# Altium PCB CongToDienOnline.PcbDoc
Units mm, origin at the board's own origin, x right, y up, seen from the top; angles counter-clockwise.
Board outline 67.95 x 66.68 mm, 2 copper layers (Top Layer, Bottom Layer); 39 components, 33 nets, 182 pads, 63 vias.
Unrouted connection lines stored in the file: 9.
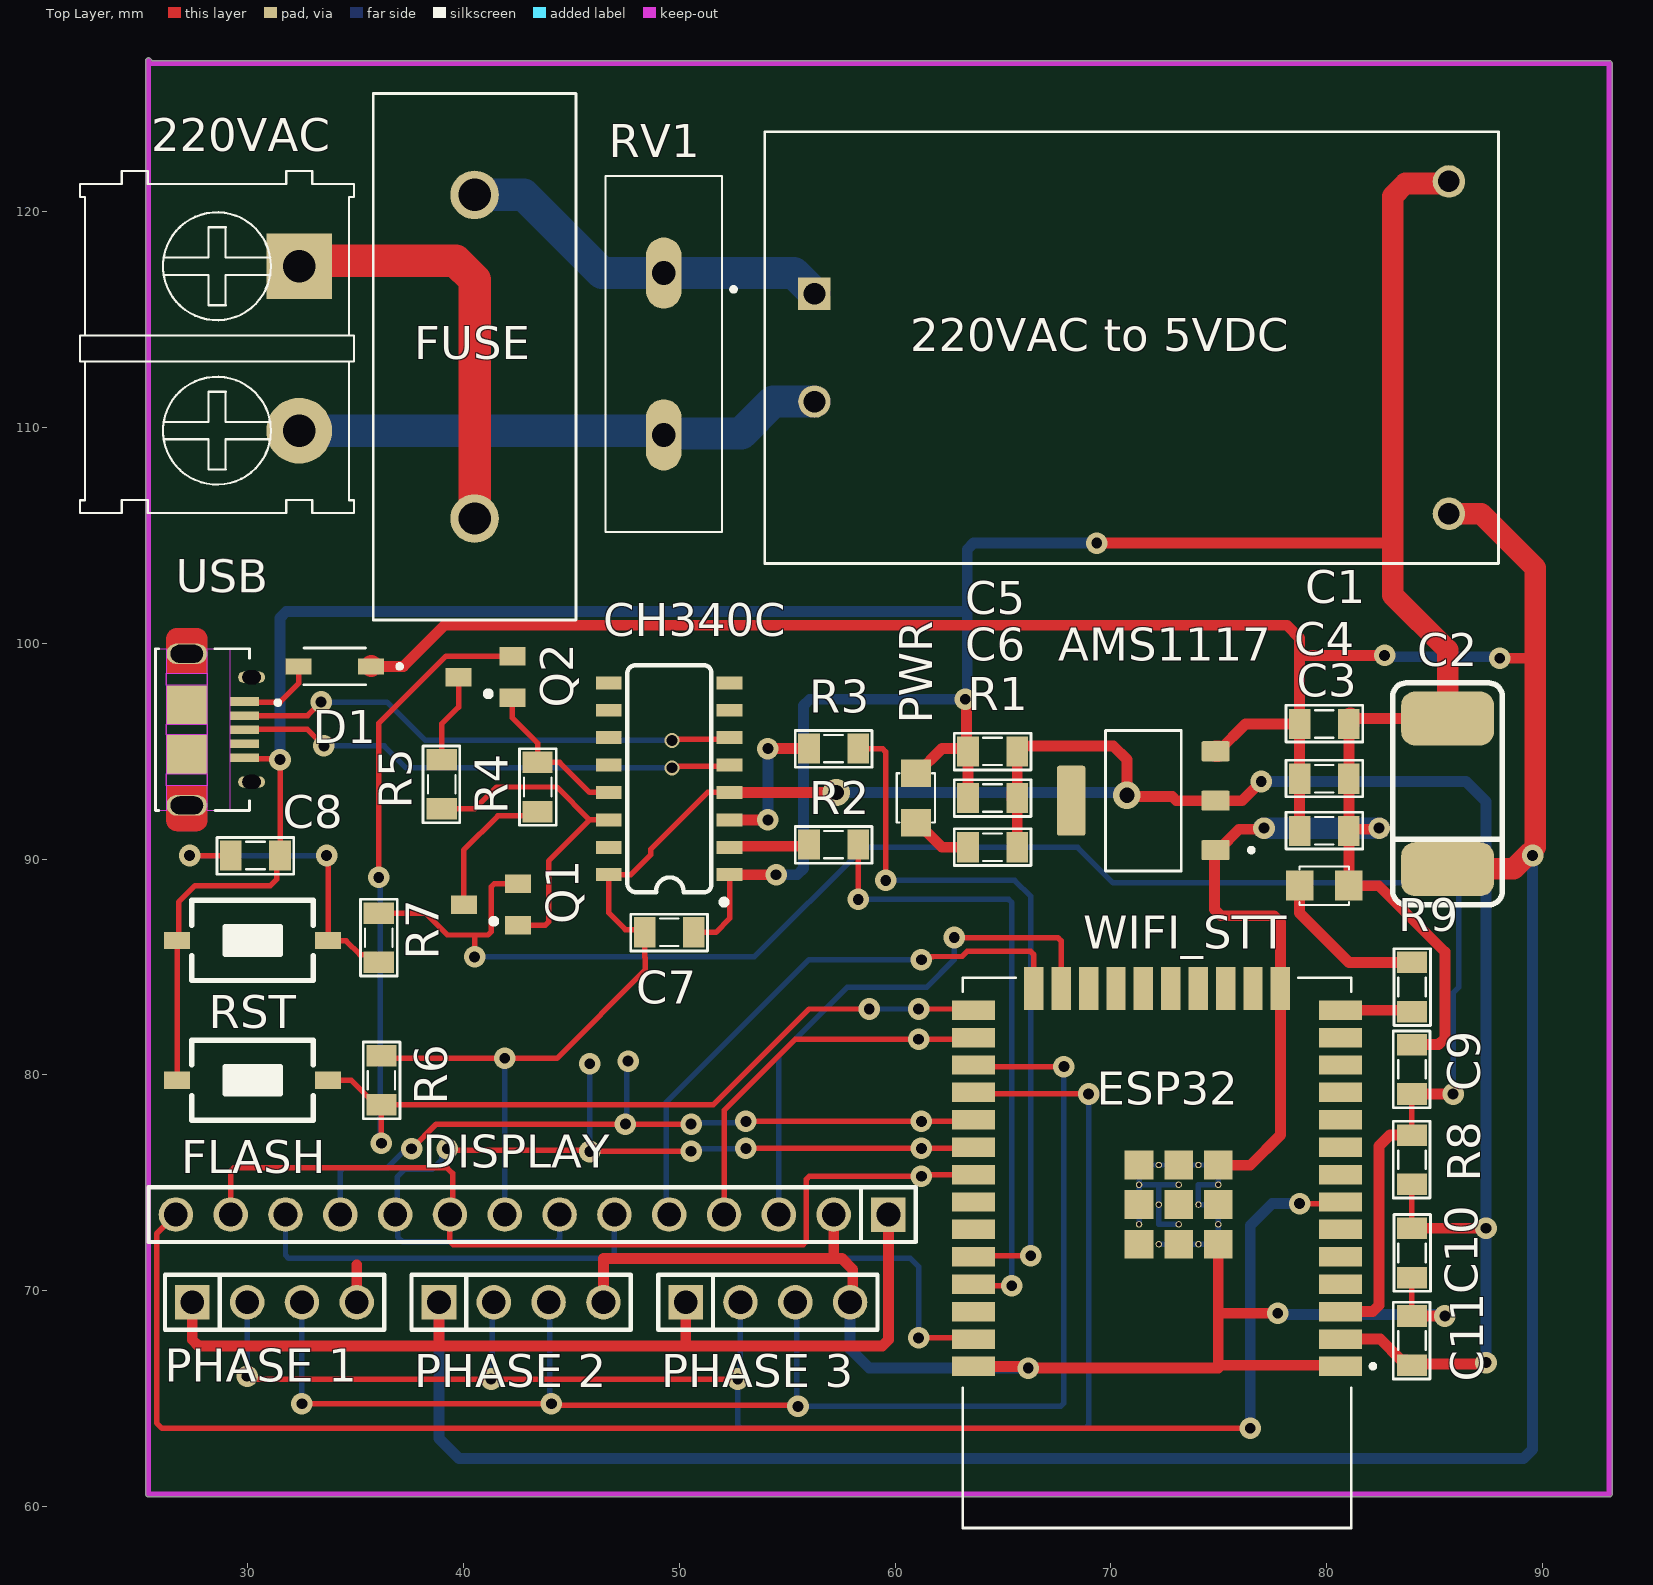
[diagram p0: Top Layer view]
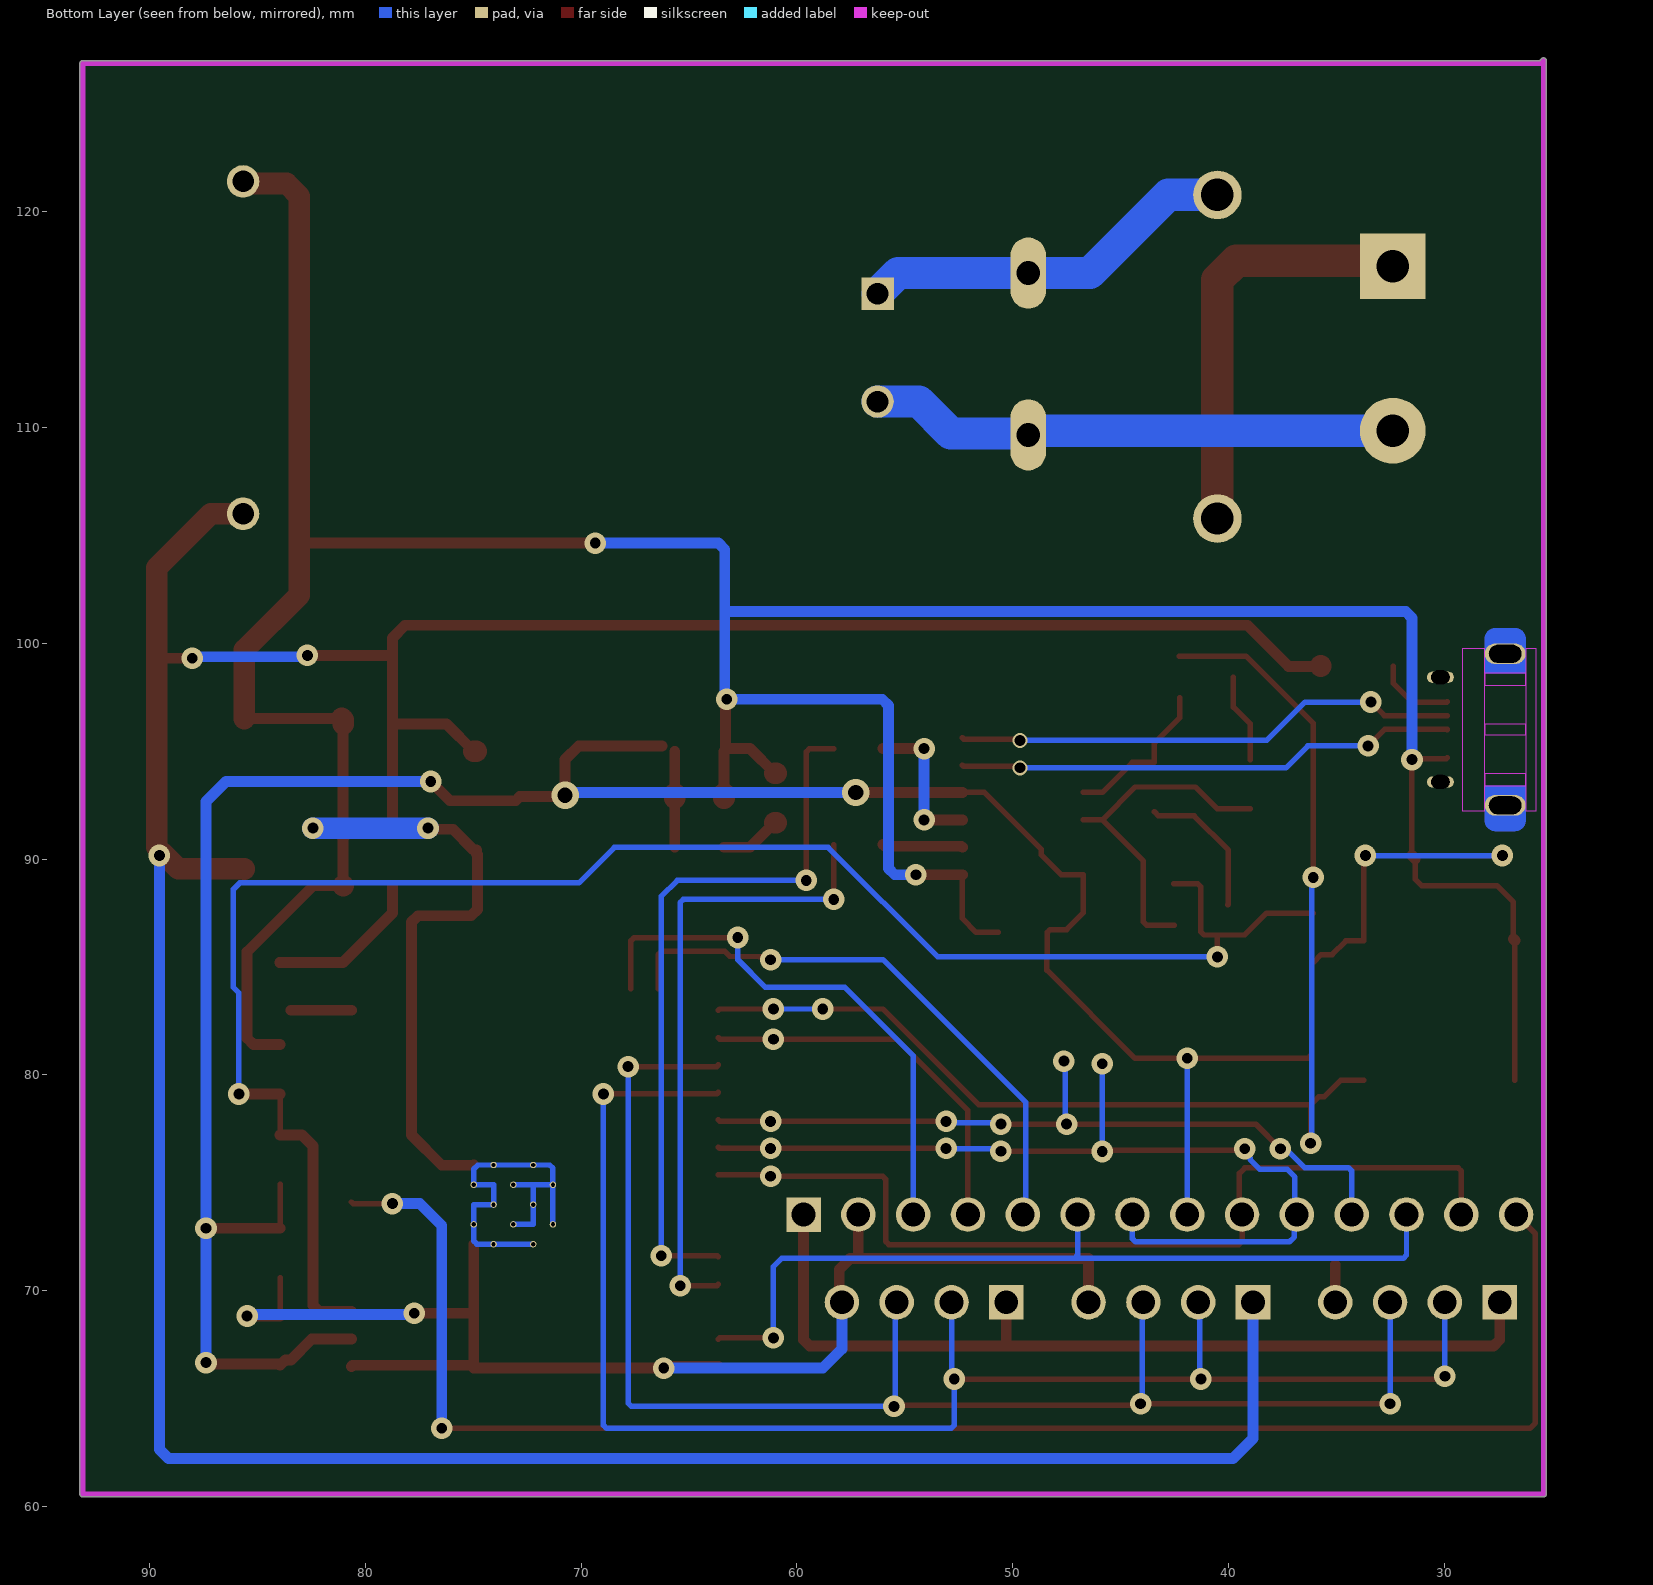
[diagram p1: Bottom Layer view, seen from below]
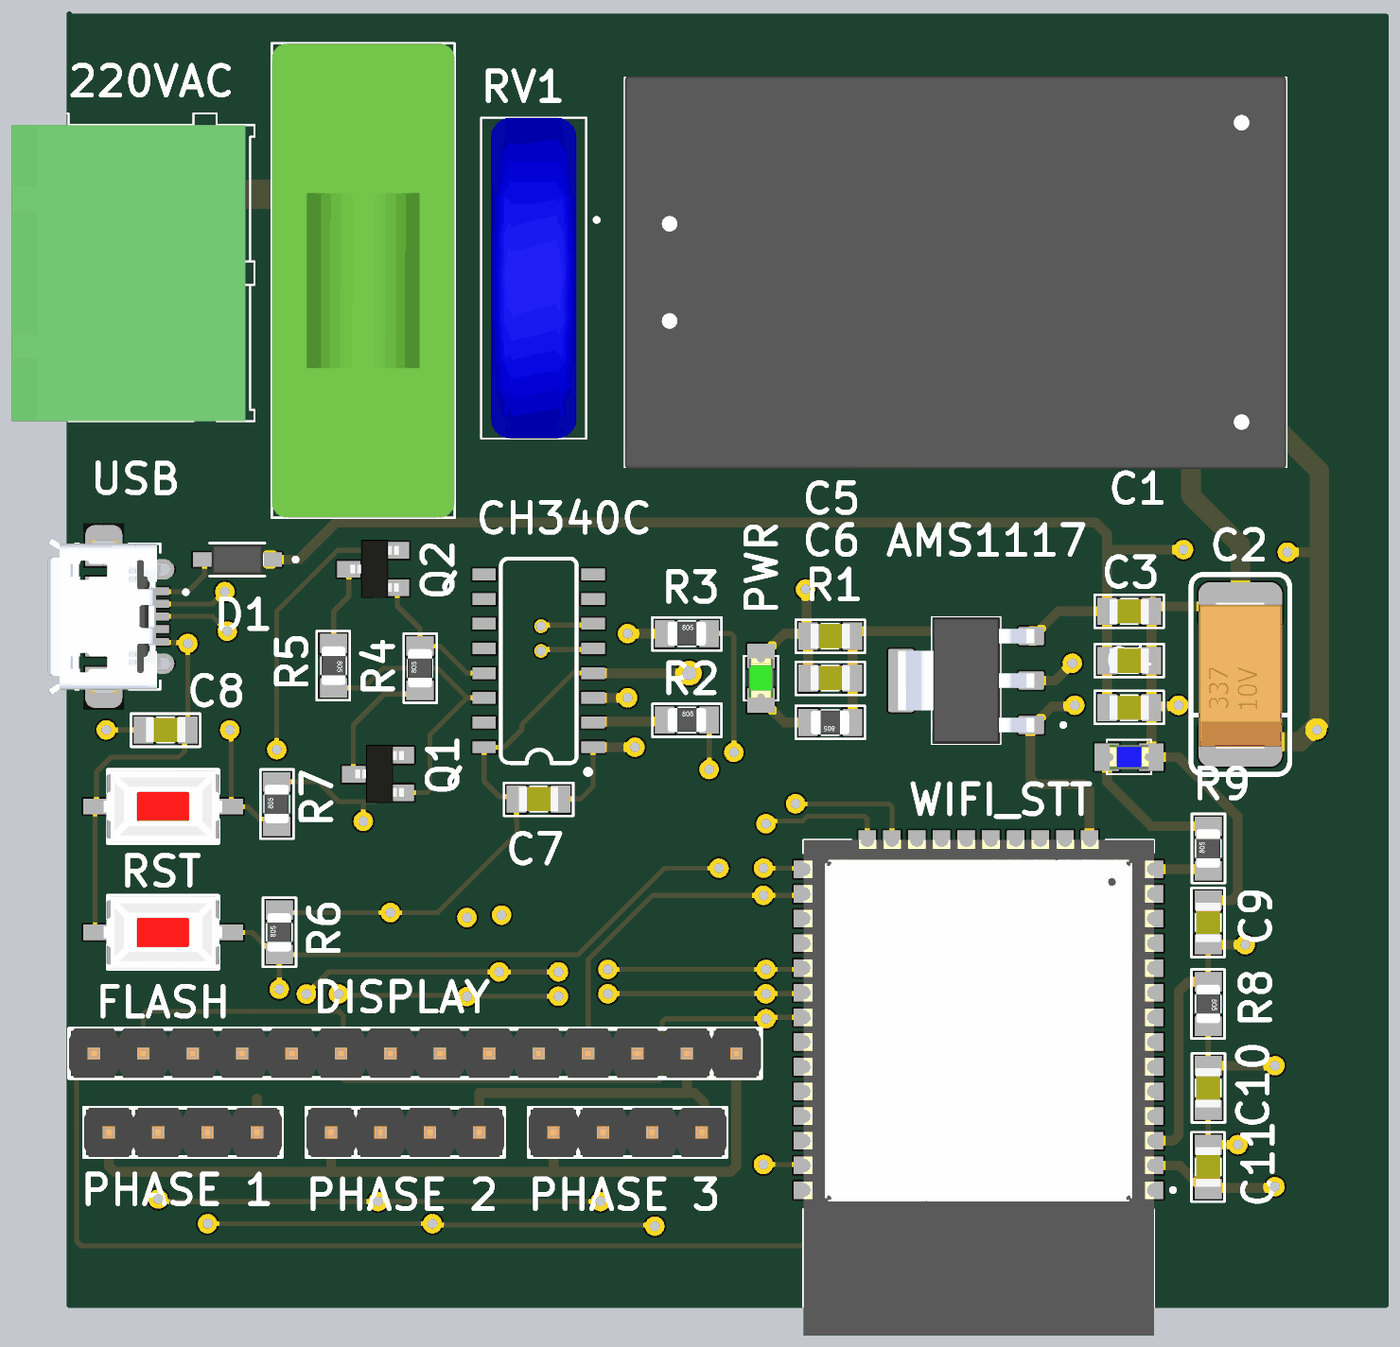
[diagram p2: 3D render of the assembled board from above, using the file's embedded part models]

## Layer stack, top to bottom
Top Solder: solder mask 0.0102, Solder Resist, Dk 3.5
Top Layer: signal copper 0.0356
Dielectric 1: dielectric 0.32, FR-4, Dk 4.8
Bottom Layer: signal copper 0.0356
Bottom Solder: solder mask 0.0102, Solder Resist, Dk 3.5

## Board outline
25.4,60.452 cw(c25.4,60.579) 25.273,60.579 25.273,127 cw(c25.4,127) 25.491,127.09 25.58,127 93.091,127 cw(c93.091,126.873) 93.218,126.873 93.218,60.579 cw(c93.091,60.579) 93.091,60.452

## Design rules (kind name [scope] priority, off if disabled: settings)
Clearance [All] p1: gap=0.254 ignorepadtopadclearanceinfootprint=FALSE except(0: Arc-Hole Track-Hole SMDPad-Hole THPad-Hole Via-Hole Fill-Hole Poly-Hole Region-Hole Text-Hole)
PolygonConnect [All] p1: connectstyle=Relief reliefconductorwidth=0.254 reliefentries=4 polygonreliefangle="90 Angle" airgapwidth=0.254
RoutingVias [All] p1: holewidth=0.7 width=1.27 viastyle="Through Hole" minholewidth=0.2 minwidth=0.7 maxholewidth=0.5 maxwidth=1
SolderMaskExpansion [All] p1: expansion=0.102 istentingtop=FALSE
Width [All] p1: maxlimit=2 minlimit=0.254 preferedwidth=0.5 toplayer_maxwidth=1 minimp=50.000000 maximp=50.000000 favimp=50.000000
30 further rules are at their usual default settings.

## Classes and differential pairs
component class Output: DISPLAY "PHASE 1" "PHASE 2" "PHASE 3"
component class ESP32: C9 C10 C11 ESP32 R8 R9 WIFI_STT
component class USB: C7 C8 CH340C D1 FLASH Q1 Q2 R2 R3 R4 R5 RST USB
component class Power: 220VAC "220VAC to 5VDC" AMS1117 C1 C2 C3 C4 C5 C6 FUSE PWR R1 RV1

## Components (designator, comment, footprint, x,y, rotation, side; value= is the part's Value field where it differs from the comment)
220VAC "KF2" KF2-7.62 28.575,113.665 r270 top (schematic designator J1)
"220VAC to 5VDC" "HLK-PM01" CONV_HLK-PM01 70.961,113.705 r0 top (schematic designator PS1)
AMS1117 "AMS1117-3.3" SOT229P700X180-4N 71.501,92.71 r180 top (schematic designator U1)
C1 "100nF" CAP_0805 79.883,96.266 r180 top value=33p
C2 "CAP_TAN_SMD" CAP_7343 85.598,92.964 r90 top
C3 "10uF/0805" CAP_0805 79.883,91.313 r180 top value=33p
C4 "100nF/0805" CAP_0805 79.883,93.726 r180 top value=33p
C5 "10uF/0805" CAP_0805 64.516,94.996 r0 top value=33p
C6 "100nF/0805" CAP_0805 64.516,92.837 r0 top value=33p
C7 "100nF/0805" CAP_0805 49.53,86.614 r0 top value=33p
C8 "0.1uF/25V/0805" CAP_0805 30.353,90.17 r0 top value=33p
C9 "0.1uF/25v/0805" CAP_0805 83.947,80.264 r270 top value=33p
C10 "0.1uF/25v/0805" CAP_0805 83.947,71.755 r90 top value=33p
C11 "22uF/25V/0805" CAP_0805 83.947,67.691 r270 top value=33p
CH340C "CH340C" SOP-16 49.53,93.726 r90 top (schematic designator U3)
D1 "1N5819" SOD3715X145N 34.036,98.933 r180 top
DISPLAY "JP14" JP14-D1T 59.69,73.533 r180 top (schematic designator C12)
ESP32 "ESP32-WROOM-32" MODULE_ESP32-WROOM-32 72.136,71.755 r180 top (schematic designator IC1)
FLASH "SW" SW-SMD 30.226,79.756 r180 top value="SW chip 2 pin" (schematic designator SW1)
FUSE "F1A" Fuse4 40.513,113.284 r90 top value=Fuse (schematic designator F1)
"PHASE 1" "PHASE 3" JP4-D1T 27.432,69.469 r0 top (schematic designator C15)
"PHASE 2" "PHASE 2" JP4-D1T 38.862,69.469 r0 top (schematic designator C14)
"PHASE 3" "PHASE 1" JP4-D1T 50.292,69.469 r0 top (schematic designator C13)
PWR "LED" LED-0805-Green 60.96,91.694 r90 top value="LED 3 ly Single Colour" (schematic designator LED1)
Q1 "S8050" SOT23 41.275,87.884 r90 top
Q2 "S8050" SOT23 41.021,98.425 r90 top
R1 "1K/0805" RES-SMD-0805 64.516,90.551 r180 top
R2 "1k/0805" RES-SMD-0805 57.15,90.678 r0 top (schematic designator R9)
R3 "1k/0805" RES-SMD-0805 57.15,95.123 r0 top (schematic designator R10)
R4 "10k/0805" RES-SMD-0805 43.434,93.345 r90 top (schematic designator R5)
R5 "10k/0805" RES-SMD-0805 38.989,93.472 r270 top (schematic designator R6)
R6 "10k/0805" RES-SMD-0805 36.195,79.756 r90 top (schematic designator R7)
R7 "0R/0805" RES-SMD-0805 36.068,86.36 r90 top (schematic designator R11)
R8 "10K/0805" RES-SMD-0805 83.947,76.073 r270 top (schematic designator R12)
R9 "330R/0805" RES-SMD-0805 83.947,84.074 r90 top
RST "SW" SW-SMD 30.226,86.233 r180 top value="SW chip 2 pin" (schematic designator SW2)
RV1 "MOV-14D471K" MOV14D471K 49.276,113.411 r90 top
USB "USB" HRS_ZX62D-B-5P8 27.253,96.005 r270 top (schematic designator USB1)
WIFI_STT "WIFI_STATUS_LED" LED-0805-Blue 78.74,88.773 r0 top value="LED 3 ly Single Colour" (schematic designator LED2)

## Footprints (in the part's own frame and the unit in brackets; to place one, negate y for a bottom-side part, rotate by r counter-clockwise, add the part's x,y. Pads: shape width x height; smd on the part's side, far side on the other; paste and mask are expansions set on the pad)
CAP_0805 [mil]
  rect 39.37x55 smd: 1(-45,0) 2(45,0)
  silkscreen extent -70,-34 70,33, body extent -40,-25 40,25, height 24
CAP_7343 [mm] "Capacitor Tantalum 7343"
  rrect50% 2.5x4.3 smd: 1(-3.429,0) 2(3.556,0)
  silkscreen extent -5.08,-2.54 5.21,2.54, body extent -3.75,-2.14 3.75,2.16, height 2.8
CONV_HLK-PM01 [mm]
  rect 1.508x1.508 / inner round 1.508 / far side rect 1.508x1.508 hole 1: 1(-14.7,2.5)
  round 1.508 hole 1: 2(-14.7,-2.5) 3(14.7,7.7) 4(14.7,-7.7)
  silkscreen extent -18.55,-10 17,10, body extent -17,-10.1 17,10.1, height 15
Fuse4 [mm] "FUSEHOLDER BLOCKS - PCB - CLIP COVER - THT - WR-FSH"
  round 2.25 hole 1.5: 1(-7.5,0) 2(7.5,0)
  silkscreen extent -12.2,-4.7 12.2,4.7, body extent -12.2,-4.7 12.2,4.7, height 23.72
HRS_ZX62D-B-5P8 [mm]
  rect 0.4x1.35 smd mask+0.1: 1(-1.3,2.6) 2(-0.65,2.6) 3(0,2.6) 4(0.65,2.6) 5(1.3,2.6)
  oval 0.525x1.25 hole 0.65 slot 0.85 at 90 deg mask+0.1: S1(-2.425,2.925) S2(2.425,2.925)
  oval 0.95x1.9 hole 0.825 slot 1.5 at 90 deg mask+0.1: S3(-3.512,-0.075) S6(3.512,-0.075)
  rect 1.8x1.9 smd mask+0.1: S4(-1.15,-0.075) S5(1.15,-0.075)
  Top Layer region: -2.6,-0.075 -3.1,-0.075 -3.1,0.375 -3.1,0.391 -3.102,0.406 -3.104,0.422 -3.107,0.437 -3.11,0.453 -3.115,0.468 -3.12,0.483 -3.126,0.497 -3.133,0.511 -3.14,0.525 -3.148,0.538 -3.157,0.551 -3.167,0.564 -3.177,0.576 -3.188,0.587 -3.199,0.598 -3.211,0.608 -3.224,0.618 -3.237,0.627 -3.25,0.635 -3.264,0.642 -3.278,0.649 -3.292,0.655 -3.307,0.66 -3.322,0.665 -3.338,0.668 -3.353,0.671 -3.369,0.673 -3.384,0.675 -3.641,0.675 -3.656,0.673 -3.672,0.671 -3.687,0.668 -3.703,0.665 -3.718,0.66 -3.733,0.655 -3.747,0.649 -3.761,0.642 -3.775,0.635 -3.788,0.627 -3.801,0.618 -3.814,0.608 -3.826,0.598 -3.837,0.587 -3.848,0.576 -3.858,0.564 -3.868,0.551 -3.877,0.538 -3.885,0.525 -3.892,0.511 -3.899,0.497 -3.905,0.483 -3.91,0.468 -3.915,0.453 -3.918,0.437 -3.921,0.422 -3.923,0.406 -3.925,0.391 -3.925,0.375 -3.925,-0.075 -4.7,-0.075 -4.7,0.375 -4.699,0.401 -4.697,0.427 -4.694,0.453 -4.689,0.479 -4.683,0.504 -4.676,0.53 -4.667,0.554 -4.657,0.578 -4.646,0.602 -4.633,0.625 -4.619,0.647 -4.605,0.669 -4.589,0.69 -4.572,0.71 -4.554,0.729 -4.535,0.747 -4.515,0.764 -4.494,0.78 -4.472,0.794 -4.45,0.808 -4.427,0.821 -4.403,0.832 -4.379,0.842 -4.355,0.851 -4.329,0.858 -4.304,0.864 -4.278,0.869 -4.252,0.872 -4.226,0.874 -4.2,0.875 -2.6,0.875
  Top Layer region: 4.7,-0.525 4.699,-0.551 4.697,-0.577 4.694,-0.603 4.689,-0.629 4.683,-0.654 4.676,-0.68 4.667,-0.704 4.657,-0.728 4.646,-0.752 4.633,-0.775 4.619,-0.797 4.605,-0.819 4.589,-0.84 4.572,-0.86 4.554,-0.879 4.535,-0.897 4.515,-0.914 4.494,-0.93 4.472,-0.944 4.45,-0.958 4.427,-0.971 4.403,-0.982 4.379,-0.992 4.355,-1.001 4.329,-1.008 4.304,-1.014 4.278,-1.019 4.252,-1.022 4.226,-1.024 4.2,-1.025 2.6,-1.025 2.6,-0.075 3.1,-0.075 3.1,-0.525 3.1,-0.541 3.102,-0.556 3.104,-0.572 3.107,-0.587 3.11,-0.603 3.115,-0.618 3.12,-0.633 3.126,-0.647 3.133,-0.661 3.14,-0.675 3.148,-0.688 3.157,-0.701 3.167,-0.714 3.177,-0.726 3.188,-0.737 3.199,-0.748 3.211,-0.758 3.224,-0.768 3.237,-0.777 3.25,-0.785 3.264,-0.792 3.278,-0.799 3.292,-0.805 3.307,-0.81 3.322,-0.815 3.338,-0.818 3.353,-0.821 3.369,-0.823 3.384,-0.825 3.641,-0.825 3.656,-0.823 3.672,-0.821 3.687,-0.818 3.703,-0.815 3.718,-0.81 3.733,-0.805 3.747,-0.799 3.761,-0.792 3.775,-0.785 3.788,-0.777 3.801,-0.768 3.814,-0.758 3.826,-0.748 3.837,-0.737 3.848,-0.726 3.858,-0.714 3.868,-0.701 3.877,-0.688 3.885,-0.675 3.892,-0.661 3.899,-0.647 3.905,-0.633 3.91,-0.618 3.915,-0.603 3.918,-0.587 3.921,-0.572 3.923,-0.556 3.925,-0.541 3.925,-0.525 3.925,-0.075 4.7,-0.075
  Top Layer region: -2.6,-1.025 -4.2,-1.025 -4.226,-1.024 -4.252,-1.022 -4.278,-1.019 -4.304,-1.014 -4.329,-1.008 -4.355,-1.001 -4.379,-0.992 -4.403,-0.982 -4.427,-0.971 -4.45,-0.958 -4.472,-0.944 -4.494,-0.93 -4.515,-0.914 -4.535,-0.897 -4.554,-0.879 -4.572,-0.86 -4.589,-0.84 -4.605,-0.819 -4.619,-0.797 -4.633,-0.775 -4.646,-0.752 -4.657,-0.728 -4.667,-0.704 -4.676,-0.68 -4.683,-0.654 -4.689,-0.629 -4.694,-0.603 -4.697,-0.577 -4.699,-0.551 -4.7,-0.525 -4.7,-0.075 -3.925,-0.075 -3.925,-0.55 -3.925,-0.564 -3.923,-0.579 -3.922,-0.593 -3.919,-0.607 -3.916,-0.621 -3.912,-0.635 -3.907,-0.649 -3.901,-0.662 -3.895,-0.675 -3.888,-0.688 -3.881,-0.7 -3.872,-0.712 -3.864,-0.723 -3.854,-0.734 -3.844,-0.744 -3.834,-0.754 -3.823,-0.764 -3.812,-0.772 -3.8,-0.781 -3.787,-0.788 -3.775,-0.795 -3.762,-0.801 -3.749,-0.807 -3.735,-0.812 -3.721,-0.816 -3.707,-0.819 -3.693,-0.822 -3.679,-0.823 -3.664,-0.825 -3.384,-0.825 -3.369,-0.823 -3.353,-0.821 -3.338,-0.818 -3.322,-0.815 -3.307,-0.81 -3.292,-0.805 -3.278,-0.799 -3.264,-0.792 -3.25,-0.785 -3.237,-0.777 -3.224,-0.768 -3.211,-0.758 -3.199,-0.748 -3.188,-0.737 -3.177,-0.726 -3.167,-0.714 -3.157,-0.701 -3.148,-0.688 -3.14,-0.675 -3.133,-0.661 -3.126,-0.647 -3.12,-0.633 -3.115,-0.618 -3.11,-0.603 -3.107,-0.587 -3.104,-0.572 -3.102,-0.556 -3.1,-0.541 -3.1,-0.525 -3.1,-0.075 -2.6,-0.075
  Top Layer region: 4.226,0.874 4.252,0.872 4.278,0.869 4.304,0.864 4.329,0.858 4.355,0.851 4.379,0.842 4.403,0.832 4.427,0.821 4.45,0.808 4.472,0.794 4.494,0.78 4.515,0.764 4.535,0.747 4.554,0.729 4.572,0.71 4.589,0.69 4.605,0.669 4.619,0.647 4.633,0.625 4.646,0.602 4.657,0.578 4.667,0.554 4.676,0.53 4.683,0.504 4.689,0.479 4.694,0.453 4.697,0.427 4.699,0.401 4.7,0.375 4.7,-0.075 3.925,-0.075 3.925,0.4 3.925,0.414 3.923,0.429 3.922,0.443 3.919,0.457 3.916,0.471 3.912,0.485 3.907,0.499 3.901,0.512 3.895,0.525 3.888,0.538 3.881,0.55 3.872,0.562 3.864,0.573 3.854,0.584 3.844,0.594 3.834,0.604 3.823,0.614 3.812,0.622 3.8,0.631 3.787,0.638 3.775,0.645 3.762,0.651 3.749,0.657 3.735,0.662 3.721,0.666 3.707,0.669 3.693,0.672 3.679,0.673 3.664,0.675 3.384,0.675 3.369,0.673 3.353,0.671 3.338,0.668 3.322,0.665 3.307,0.66 3.292,0.655 3.278,0.649 3.264,0.642 3.25,0.635 3.237,0.627 3.224,0.618 3.211,0.608 3.199,0.598 3.188,0.587 3.177,0.576 3.167,0.564 3.157,0.551 3.148,0.538 3.14,0.525 3.133,0.511 3.126,0.497 3.12,0.483 3.115,0.468 3.11,0.453 3.107,0.437 3.104,0.422 3.102,0.406 3.1,0.391 3.1,0.375 3.1,-0.075 2.6,-0.075 2.6,0.875 4.2,0.875
  Bottom Layer region: -2.6,-0.075 -3.1,-0.075 -3.1,0.375 -3.1,0.391 -3.102,0.406 -3.104,0.422 -3.107,0.437 -3.11,0.453 -3.115,0.468 -3.12,0.483 -3.126,0.497 -3.133,0.511 -3.14,0.525 -3.148,0.538 -3.157,0.551 -3.167,0.564 -3.177,0.576 -3.188,0.587 -3.199,0.598 -3.211,0.608 -3.224,0.618 -3.237,0.627 -3.25,0.635 -3.264,0.642 -3.278,0.649 -3.292,0.655 -3.307,0.66 -3.322,0.665 -3.338,0.668 -3.353,0.671 -3.369,0.673 -3.384,0.675 -3.641,0.675 -3.656,0.673 -3.672,0.671 -3.687,0.668 -3.703,0.665 -3.718,0.66 -3.733,0.655 -3.747,0.649 -3.761,0.642 -3.775,0.635 -3.788,0.627 -3.801,0.618 -3.814,0.608 -3.826,0.598 -3.837,0.587 -3.848,0.576 -3.858,0.564 -3.868,0.551 -3.877,0.538 -3.885,0.525 -3.892,0.511 -3.899,0.497 -3.905,0.483 -3.91,0.468 -3.915,0.453 -3.918,0.437 -3.921,0.422 -3.923,0.406 -3.925,0.391 -3.925,0.375 -3.925,-0.075 -4.7,-0.075 -4.7,0.375 -4.699,0.401 -4.697,0.427 -4.694,0.453 -4.689,0.479 -4.683,0.504 -4.676,0.53 -4.667,0.554 -4.657,0.578 -4.646,0.602 -4.633,0.625 -4.619,0.647 -4.605,0.669 -4.589,0.69 -4.572,0.71 -4.554,0.729 -4.535,0.747 -4.515,0.764 -4.494,0.78 -4.472,0.794 -4.45,0.808 -4.427,0.821 -4.403,0.832 -4.379,0.842 -4.355,0.851 -4.329,0.858 -4.304,0.864 -4.278,0.869 -4.252,0.872 -4.226,0.874 -4.2,0.875 -2.6,0.875
  Bottom Layer region: 4.7,-0.525 4.699,-0.551 4.697,-0.577 4.694,-0.603 4.689,-0.629 4.683,-0.654 4.676,-0.68 4.667,-0.704 4.657,-0.728 4.646,-0.752 4.633,-0.775 4.619,-0.797 4.605,-0.819 4.589,-0.84 4.572,-0.86 4.554,-0.879 4.535,-0.897 4.515,-0.914 4.494,-0.93 4.472,-0.944 4.45,-0.958 4.427,-0.971 4.403,-0.982 4.379,-0.992 4.355,-1.001 4.329,-1.008 4.304,-1.014 4.278,-1.019 4.252,-1.022 4.226,-1.024 4.2,-1.025 2.6,-1.025 2.6,-0.075 3.1,-0.075 3.1,-0.525 3.1,-0.541 3.102,-0.556 3.104,-0.572 3.107,-0.587 3.11,-0.603 3.115,-0.618 3.12,-0.633 3.126,-0.647 3.133,-0.661 3.14,-0.675 3.148,-0.688 3.157,-0.701 3.167,-0.714 3.177,-0.726 3.188,-0.737 3.199,-0.748 3.211,-0.758 3.224,-0.768 3.237,-0.777 3.25,-0.785 3.264,-0.792 3.278,-0.799 3.292,-0.805 3.307,-0.81 3.322,-0.815 3.338,-0.818 3.353,-0.821 3.369,-0.823 3.384,-0.825 3.641,-0.825 3.656,-0.823 3.672,-0.821 3.687,-0.818 3.703,-0.815 3.718,-0.81 3.733,-0.805 3.747,-0.799 3.761,-0.792 3.775,-0.785 3.788,-0.777 3.801,-0.768 3.814,-0.758 3.826,-0.748 3.837,-0.737 3.848,-0.726 3.858,-0.714 3.868,-0.701 3.877,-0.688 3.885,-0.675 3.892,-0.661 3.899,-0.647 3.905,-0.633 3.91,-0.618 3.915,-0.603 3.918,-0.587 3.921,-0.572 3.923,-0.556 3.925,-0.541 3.925,-0.525 3.925,-0.075 4.7,-0.075
  Bottom Layer region: -2.6,-1.025 -4.2,-1.025 -4.226,-1.024 -4.252,-1.022 -4.278,-1.019 -4.304,-1.014 -4.329,-1.008 -4.355,-1.001 -4.379,-0.992 -4.403,-0.982 -4.427,-0.971 -4.45,-0.958 -4.472,-0.944 -4.494,-0.93 -4.515,-0.914 -4.535,-0.897 -4.554,-0.879 -4.572,-0.86 -4.589,-0.84 -4.605,-0.819 -4.619,-0.797 -4.633,-0.775 -4.646,-0.752 -4.657,-0.728 -4.667,-0.704 -4.676,-0.68 -4.683,-0.654 -4.689,-0.629 -4.694,-0.603 -4.697,-0.577 -4.699,-0.551 -4.7,-0.525 -4.7,-0.075 -3.925,-0.075 -3.925,-0.55 -3.925,-0.564 -3.923,-0.579 -3.922,-0.593 -3.919,-0.607 -3.916,-0.621 -3.912,-0.635 -3.907,-0.649 -3.901,-0.662 -3.895,-0.675 -3.888,-0.688 -3.881,-0.7 -3.872,-0.712 -3.864,-0.723 -3.854,-0.734 -3.844,-0.744 -3.834,-0.754 -3.823,-0.764 -3.812,-0.772 -3.8,-0.781 -3.787,-0.788 -3.775,-0.795 -3.762,-0.801 -3.749,-0.807 -3.735,-0.812 -3.721,-0.816 -3.707,-0.819 -3.693,-0.822 -3.679,-0.823 -3.664,-0.825 -3.384,-0.825 -3.369,-0.823 -3.353,-0.821 -3.338,-0.818 -3.322,-0.815 -3.307,-0.81 -3.292,-0.805 -3.278,-0.799 -3.264,-0.792 -3.25,-0.785 -3.237,-0.777 -3.224,-0.768 -3.211,-0.758 -3.199,-0.748 -3.188,-0.737 -3.177,-0.726 -3.167,-0.714 -3.157,-0.701 -3.148,-0.688 -3.14,-0.675 -3.133,-0.661 -3.126,-0.647 -3.12,-0.633 -3.115,-0.618 -3.11,-0.603 -3.107,-0.587 -3.104,-0.572 -3.102,-0.556 -3.1,-0.541 -3.1,-0.525 -3.1,-0.075 -2.6,-0.075
  Bottom Layer region: 4.226,0.874 4.252,0.872 4.278,0.869 4.304,0.864 4.329,0.858 4.355,0.851 4.379,0.842 4.403,0.832 4.427,0.821 4.45,0.808 4.472,0.794 4.494,0.78 4.515,0.764 4.535,0.747 4.554,0.729 4.572,0.71 4.589,0.69 4.605,0.669 4.619,0.647 4.633,0.625 4.646,0.602 4.657,0.578 4.667,0.554 4.676,0.53 4.683,0.504 4.689,0.479 4.694,0.453 4.697,0.427 4.699,0.401 4.7,0.375 4.7,-0.075 3.925,-0.075 3.925,0.4 3.925,0.414 3.923,0.429 3.922,0.443 3.919,0.457 3.916,0.471 3.912,0.485 3.907,0.499 3.901,0.512 3.895,0.525 3.888,0.538 3.881,0.55 3.872,0.562 3.864,0.573 3.854,0.584 3.844,0.594 3.834,0.604 3.823,0.614 3.812,0.622 3.8,0.631 3.787,0.638 3.775,0.645 3.762,0.651 3.749,0.657 3.735,0.662 3.721,0.666 3.707,0.669 3.693,0.672 3.679,0.673 3.664,0.675 3.384,0.675 3.369,0.673 3.353,0.671 3.338,0.668 3.322,0.665 3.307,0.66 3.292,0.655 3.278,0.649 3.264,0.642 3.25,0.635 3.237,0.627 3.224,0.618 3.211,0.608 3.199,0.598 3.188,0.587 3.177,0.576 3.167,0.564 3.157,0.551 3.148,0.538 3.14,0.525 3.133,0.511 3.126,0.497 3.12,0.483 3.115,0.468 3.11,0.453 3.107,0.437 3.104,0.422 3.102,0.406 3.1,0.391 3.1,0.375 3.1,-0.075 2.6,-0.075 2.6,0.875 4.2,0.875
  Keep-Out Layer region: -2.05,-1.025 -2.6,-1.025 -2.6,0.875 -2.05,0.875
  Keep-Out Layer region: 0.25,-1.025 -0.25,-1.025 -0.25,0.875 0.25,0.875
  Keep-Out Layer region: 2.6,-1.025 2.05,-1.025 2.05,0.875 2.6,0.875
  Keep-Out Layer region: 3.75,0.875 -3.75,0.875 -3.75,1.925 3.75,1.925
  Keep-Out Layer region: -2.05,-1.025 -2.6,-1.025 -2.6,0.875 -2.05,0.875
  Keep-Out Layer region: 0.25,-1.025 -0.25,-1.025 -0.25,0.875 0.25,0.875
  Keep-Out Layer region: 2.6,-1.025 2.05,-1.025 2.05,0.875 2.6,0.875
  Keep-Out Layer region: 3.75,-1.525 -3.75,-1.525 -3.75,-1.025 3.75,-1.025
  silkscreen extent -3.75,-1.53 3.75,4.24, body extent -4.05,-2.95 4.05,2.85, height 1.48
JP4-D1T [mm] "4 pins, 1 row, straight, gold plating"
  rect 1.6x1.6 hole 1.1: 1(0,0)
  round 1.6 hole 1.1: 2(2.54,0) 3(5.08,0) 4(7.62,0)
  silkscreen extent -1.27,-1.27 8.89,1.27, body extent -1.27,-1.27 8.89,1.27, height 8.54
JP14-D1T [mm] "14 pins, 1 row, straight, gold plating"
  rect 1.6x1.6 hole 1.1: 1(0,0)
  round 1.6 hole 1.1: 2(2.54,0) 3(5.08,0) 4(7.62,0) 5(10.16,0) 6(12.7,0) 7(15.24,0) 8(17.78,0) 9(20.32,0) 10(22.86,0) 11(25.4,0) 12(27.94,0) 13(30.48,0) 14(33.02,0)
  silkscreen extent -1.27,-1.27 34.29,1.27, body extent -1.27,-1.27 34.29,1.27, height 8.54
KF2-7.62 [mil]
  rect 120x120 hole 59.06 unplated: 1(-150,150)
  round 120 hole 59.06 unplated: 2(150,150)
  silkscreen extent -324,-250 300,250, body extent -300,-241 300,231, height 337
LED-0805-Blue [mil]
  rect 50x55 smd: 1(0,0) 2(90,0)
  silkscreen extent 0,-35 90,35, body extent 5,-25 85,25, height 43
LED-0805-Green [mil]
  rect 50x55 smd: 1(0,0) 2(90,0)
  silkscreen extent 0,-35 90,35, body extent 5,-25 85,25, height 43
MODULE_ESP32-WROOM-32 [mm]
  rect 2x0.9 smd: 1(-8.5,5.26) 2(-8.5,3.99) 3(-8.5,2.72) 4(-8.5,1.45) 5(-8.5,0.18) 6(-8.5,-1.09) 7(-8.5,-2.36) 8(-8.5,-3.63) 9(-8.5,-4.9) 10(-8.5,-6.17) 11(-8.5,-7.44) 12(-8.5,-8.71) 13(-8.5,-9.98) 14(-8.5,-11.25) 25(8.5,-11.25) 26(8.5,-9.98) 27(8.5,-8.71) 28(8.5,-7.44) 29(8.5,-6.17) 30(8.5,-4.9) 31(8.5,-3.63) 32(8.5,-2.36) 33(8.5,-1.09) 34(8.5,0.18) 35(8.5,1.45) 36(8.5,2.72) 37(8.5,3.99) 38(8.5,5.26)
  rect 0.9x2 smd: 15(-5.715,-12.25) 16(-4.445,-12.25) 17(-3.175,-12.25) 18(-1.905,-12.25) 19(-0.635,-12.25) 20(0.635,-12.25) 21(1.905,-12.25) 22(3.175,-12.25) 23(4.445,-12.25) 24(5.715,-12.25)
  rect 1.33x1.33 smd: 39_1(-2.835,-0.405) 39_2(-1,-0.405) 39_3(0.835,-0.405) 39_4(-2.835,-2.24) 39_5(-1,-2.24) 39_6(0.835,-2.24) 39_7(-2.835,-4.075) 39_8(-1,-4.075) 39_9(0.835,-4.075)
  round 0.3 hole 0.2: 39_10(-1.917,-0.405) 39_11(-0.082,-0.405) 39_12(-2.835,-1.322) 39_13(-1,-1.322) 39_14(0.835,-1.322) 39_15(-1.917,-2.24) 39_16(-0.082,-2.24) 39_17(-2.835,-3.157) 39_18(-1,-3.157) 39_19(0.835,-3.157) 39_20(-1.917,-4.075) 39_21(-0.082,-4.075)
  silkscreen extent -10.1,-12.75 9,12.75, body extent -9.02,-12.75 8.98,12.75, height 3.2
MOV14D471K [mm]
  oval 3.3x1.65 hole 1.1: 1(-3.75,0) 2(3.75,0)
  silkscreen extent -8.25,-2.7 8.25,2.7, body extent -8.25,-2.2 8.25,2.2, height 20
RES-SMD-0805 [mil]
  rect 39.37x55 smd: 1(-45,0) 2(45,0)
  silkscreen extent -70,-34 70,33, body extent -39,-25 39,25, height 31
SOD3715X145N [mm]
  rect 1.21x0.73 smd: A(1.68,0) C(-1.68,0)
  silkscreen extent -3.1,-0.85 1.43,0.85, body extent -1.83,-0.77 1.83,0.77, height 0.8
SOP-16 [mm]
  rect 0.6x1.2 smd: 1(-4.445,-2.8) 2(-3.175,-2.8) 3(-1.905,-2.8) 4(-0.635,-2.8) 5(0.635,-2.8) 6(1.905,-2.8) 7(3.175,-2.8) 8(4.445,-2.8) 9(4.445,2.8) 10(3.175,2.8) 11(1.905,2.8) 12(0.635,2.8) 13(-0.635,2.8) 14(-1.905,2.8) 15(-3.175,2.8) 16(-4.445,2.8)
  silkscreen extent -5.84,-2.67 5.26,1.95, body extent -4.95,-3.47 4.95,3.47, height 1.75
SOT23 [mm] "SOT 23 _ 1-3-2"
  rect 0.85x1.2 smd: 1(-0.94,-1.245) 2(0.985,-1.25) 3(0.005,1.25)
  silkscreen extent -0.88,-0.25 -0.64,0, body extent -1.47,-1.33 1.53,1.17, height 1.06
SOT229P700X180-4N [mm]
  rrect15% 1.31x0.93 smd: 1(-3.345,2.29) 2(-3.345,0) 3(-3.345,-2.29)
  rrect15% 1.31x3.24 smd: 4(3.345,0)
  silkscreen extent -5.1,-3.25 1.75,3.25, body extent -3.5,-3.25 3.5,3.25, height 1.8
SW-SMD [mm] "Switch SMD type"
  rect 1.2x0.8 smd: 1(-3.5,0) 2(3.5,0)
  silkscreen extent -2.82,-1.85 2.82,1.85, body extent -3.05,-1.85 3.05,1.85, height 2.5

## Part data
220VAC: Manufacturer="Würth Elektronik eiSos GmbH", partNo=691103110002, ComponentLink1 Description=Manufacturer, ComponentLink1URL=http://www.we-online.com, ComponentLink2 Description=Datasheet, ComponentLink2URL=http://katalog.we-online.de/em/datasheet/6911031100xx.pdf, Created by="Karrer Zheng", Created Date="29 October 2013", NoPins=2
"220VAC to 5VDC": "The HLK-PM01 is a small size low cost AC to DC converter which can take in 110V/220V AC at 50/60 Hz and give 5V 3W output. The module is can be used in designs which run on 5V and needs to be powered form the AC mains.", Package=None, Availability="Not in stock", Check_prices=https://www.snapeda.com/parts/hlk-pm01/Hi-link/view-part/?ref=eda, MF=Hi-link, MP=hlk-pm01, Price=None, SnapEDA_Link=https://www.snapeda.com/parts/hlk-pm01/Hi-link/view-part/?ref=snap
AMS1117: "Sot223/Pkg 1-Amp 3.3-Volt Low Drop Out Voltage Regulatator", Package="SOT-223 Seeed Technology", Availability="Not in stock", Check_prices=https://www.snapeda.com/parts/AMS1117-3.3/Advanced+Monolithic+Systems/view-part/?ref=eda, MF="Advanced Monolithic Systems", MP=AMS1117-3.3, Price=None, SnapEDA_Link=https://www.snapeda.com/parts/AMS1117-3.3/Advanced+Monolithic+Systems/view-part/?ref=snap
C1 C3 C4 C5 C6 C7 C8 C9 C10 C11: library part CapSMD, "Capacitor", LatestRevisionDate=17-Jul-2002, LatestRevisionNote="Re-released for DXP Platform.", PackageReference=RAD-0.3, Published=8-Jun-2000, Publisher="Altium Limited"
C2: "Polazied Tantalum Capacitor"
CH340C: "USB to serial chip CH340", Package=Package, Availability=Unavailable, Check_prices=https://www.snapeda.com/parts/CH340C/WCH/view-part/5428851/?ref=eda, MF=WCH, MP=CH340C, Price=None, SnapEDA_Link=https://www.snapeda.com/parts/CH340C/WCH/view-part/5428851/?ref=snap
D1: library part 1N5819HW-7-F, "Diode Schottky 40 V 1A Surface Mount SOD-123", Package="SOD-123 Fairchild Semiconductor", Availability="In Stock", Check_prices=https://www.snapeda.com/parts/1N5819HW-7-F/Diodes+Inc./view-part/?ref=eda, MF="Diodes Inc.", MP=1N5819HW-7-F, Price=None, Purchase-URL=https://pricing.snapeda.com/search/part/1N5819HW-7-F/?ref=eda, SnapEDA_Link=https://www.snapeda.com/parts/1N5819HW-7-F/Diodes+Inc./view-part/?ref=snap
DISPLAY: "WR-PHD 2.54 mm Angled Socket Header", Manufacturer="W¨¹rth Elektronik eiSos GmbH", partNo=613014143121, ComponentLink1 Description=Manufacturer, ComponentLink1URL=http://www.we-online.com, ComponentLink2 Description=Datasheet, ComponentLink2URL=http://katalog.we-online.de/em/datasheet/6130xx143121.pdf, Created by="Karrer Zheng", Created Date="29 March 2013", NoPins=14
ESP32: "Bluetooth, WiFi Transceiver Module 2.4GHz ~ 2.5GHz Surface Mount", Package="Module Espressif Systems", Digi-Key_Part_Number=1904-1010-1-ND, Digi-Key_Purchase_URL=https://www.digikey.com/product-detail/en/espressif-systems/ESP32-WROOM-32/1904-1010-1-ND/8544305?utm_source=snapeda&utm_medium=aggregator&utm_campaign=symbol, MF="Espressif Systems", MP=ESP32-WROOM-32, SnapEDA_Link=https://www.snapeda.com/parts/ESP32-WROOM-32/Espressif%20Systems/view-part/2753322/?ref=snap
FLASH RST: library part SW2, "Switch button 2 pin"
FUSE: library part Fuse, "Fuse", Designed by=VanDungEvn
"PHASE 1" "PHASE 2" "PHASE 3": library part JP4, "WR-PHD 2.54 mm Angled Socket Header", Manufacturer="W¨¹rth Elektronik eiSos GmbH", partNo=613004143121, ComponentLink1 Description=Manufacturer, ComponentLink1URL=http://www.we-online.com, ComponentLink2 Description=Datasheet, ComponentLink2URL=http://katalog.we-online.de/em/datasheet/6130xx143121.pdf, Created by="Karrer Zheng", Created Date="29 March 2013", NoPins=04
PWR: "LED Single colour Green and Red"
Q1 Q2: library part NPN, "NPN General", PackageDocument=Sep-1998, Code_JEDEC=TO-92A, ComponentLink1Description="Manufacturer Link", ComponentLink1URL=http://www.fairchildsemi.com/, ComponentLink2Description=Datasheet, ComponentLink2URL=http://www.fairchildsemi.com/ds/2N%2F2N3904.pdf, DatasheetDocument=1997, LatestRevisionDate=15-Jan-2003, LatestRevisionNote="PCB Footprint 'BCY-W3/D4.7' replaced", PackageReference=TO-92A, Published=8-Jun-2000, Publisher="Altium Limited"
R1 R2 R3 R4 R5 R6 R7 R8 R9: library part "Resistor - SMD", "Resistor SMD", Manufacturer="Generic Components", Class=Passive, Published=08/06/2000, Publisher="Altium Hobart Technology Centre"
RV1: "470 V 4.5 kA Varistor 1 Circuit Through Hole Disc 14mm", Package="Disc-14 Bourns", Availability="In Stock", Check_prices=https://www.snapeda.com/parts/MOV-14D471K/Bourns/view-part/?ref=eda, MF=Bourns, MP=MOV-14D471K, Price=None, Purchase-URL=https://pricing.snapeda.com/search/part/MOV-14D471K/?ref=eda, SnapEDA_Link=https://www.snapeda.com/parts/MOV-14D471K/Bourns/view-part/?ref=snap
USB: library part USB-M
WIFI_STT: library part LED, "LED Single colour Green and Red"

## Via types
v1: diameter 1, hole 0.5, Top Layer to Bottom Layer, 59 vias
v2: diameter 1.27, hole 0.711, Top Layer to Bottom Layer, 2 vias
v3: diameter 0.7, hole 0.5, Top Layer to Bottom Layer, 2 vias

## Nets (pads, with @x,y where several pads share a name; then routed paths per layer and width w, separated by ;. In a path a pad name is that pad's centre, name@x,y a point inside that pad or via, vN(x,y) a via of type N, cw(c..) or ccw(c..) an arc to the next point about the centre after c; other vN are vias at no path point)
3V3: AMS1117.2 C5.2 C6.2 C7.1 C10.2 C11.2 CH340C.4 CH340C.16 DISPLAY.8 ESP32.2 R1.1 R6.2 R8.2 | length 119.6
  Top Layer w0.254: R6.2 36.322,80.772 44.323,80.772 48.409,84.858 48.409,85.439 48.387,85.461 C7.1 48.26,86.741 47.498,86.741 46.73,87.509 CH340C.16 47.752,89.281 48.668,90.197 48.668,90.451 51.308,93.091 CH340C.4 ; C10.2 R8.2
  Top Layer w0.5: CH340C.4 v2(57.277,93.091) ; R1.1 C6.2 ; C6.2@65.659,93.036 C5.2 ; 66.245,95.25 70.104,95.25 70.739,94.615 v2(70.739,92.964) ; v2@70.866,93.091 71.056,92.9 72.834,92.9 73.025,92.71 AMS1117.2 76.073,92.71 v1(76.962,93.599) ; ESP32.2 82.476,67.765 83.443,66.798 83.697,66.798 C11.2 84.01,66.612 87.313,66.612 v1(87.376,66.675) ; C10.2 v1(87.376,72.898)
  Top Layer w1: C6.2 C6.2@65.659,93.035
  Bottom Layer w0.254: DISPLAY.8 v1(41.91,80.772)
  Bottom Layer w0.5: v2(57.277,93.091) 70.612,93.091 v2(70.739,92.964) ; v1(76.962,93.599) 86.448,93.599 87.376,92.671 v1(87.376,72.898) v1(87.376,66.675)
5V: "220VAC to 5VDC.4" "PHASE 1.1" "PHASE 2.1" "PHASE 3.1" AMS1117.3 C1.2 C2.1 C3.2 C4.2 D1.C DISPLAY.1 | length 219.4
  Top Layer w0.5: 27.432,69.469 27.432,67.73 27.725,67.437 38.862,67.437 ; D1.C 37.211,98.933 39.116,100.838 78.154,100.838 78.74,100.252 78.74,99.441 ; 38.862,69.469 38.862,67.437 ; 50.292,67.73 50.292,69.469 ; DISPLAY.1 59.69,67.73 59.397,67.437 38.862,67.437 ; AMS1117.3@74.966,95 76.232,96.266 C1.2 ; C3.2 C4.2 C1.2 ; v1(82.677,99.441) 78.74,99.441 ; v1(88.011,99.314) 89.662,99.314 ; C1.2 78.74,99.441
  Top Layer w1: D1.C D1.C@35.716,98.963 ; AMS1117.3 AMS1117.3@74.966,95 ; C2.1 85.614,89.551 88.662,89.551 v1@89.408,90.297 ; 85.661,106.005 87.162,106.005 89.662,103.505 89.662,99.314 v1@89.662,90.551
  Bottom Layer w0.5: 38.862,69.469 38.862,63.158 39.79,62.23 89.115,62.23 89.535,62.65 v1(89.535,90.17) ; v1(82.677,99.441) 82.74,99.377 87.947,99.377 v1(88.011,99.314)
D+: CH340C.5 USB.3 | length 23.3
  Top Layer w0.254: USB.3 29.86,96.012 32.766,96.012 v1(33.528,95.25) ; v3(49.657,94.234) 49.721,94.297 52.266,94.297 CH340C.5
  Bottom Layer w0.254: v1(33.528,95.25) 36.322,95.25 37.338,94.234 v3(49.657,94.234)
D-: CH340C.6 USB.2 | length 23.5
  Top Layer w0.254: USB.2 29.857,96.651 32.77,96.651 v1(33.401,97.282) ; v3(49.657,95.504) 49.721,95.567 52.266,95.567 CH340C.6
  Bottom Layer w0.254: v1(33.401,97.282) 36.449,97.282 38.227,95.504 v3(49.657,95.504)
EN: C9.2 ESP32.3 Q1.2 R7.2 R8.1 | length 83
  Top Layer w0.254: R7.2 38.237,87.503 39.253,86.487 40.513,86.487 ; v1(40.513,85.471) 40.513,86.487 ; Q1.2 41.424,88.869 41.275,88.721 41.275,86.636 41.126,86.487 40.513,86.487 ; R8.1 C9.2
  Top Layer w0.5: ESP32.3 82.13,69.035 82.423,69.328 82.423,76.708 82.931,77.216 R8.1 ; C9.2 v1(85.852,79.121)
  Bottom Layer w0.254: v1(40.513,85.471) 53.467,85.471 58.547,90.551 68.453,90.551 70.104,88.9 85.813,88.9 86.106,88.607 86.106,84.059 85.852,83.805 v1(85.852,79.121)
GND: "220VAC to 5VDC.3" "PHASE 1.4" "PHASE 2.4" "PHASE 3.4" AMS1117.1 C1.1 C2.2 C3.1 C4.1 C5.1 C6.1 C7.2 C8.2 C9.1 C10.1 C11.1 CH340C.1 DISPLAY.2 ESP32.1 ESP32.15 ESP32.38 ESP32.39_1 ESP32.39_2 ESP32.39_3 ESP32.39_4 ESP32.39_5 ESP32.39_6 ESP32.39_7 ESP32.39_8 ESP32.39_9 ESP32.39_10 ESP32.39_11 ESP32.39_12 ESP32.39_13 ESP32.39_14 ESP32.39_15 ESP32.39_16 ESP32.39_17 ESP32.39_18 ESP32.39_19 ESP32.39_20 ESP32.39_21 FLASH.2 PWR.2 RST.2 USB.5 WIFI_STT.2 | length 281.8
  Top Layer w0.254: FLASH.2 RST.2 ; RST.2@26.797,86.304 26.797,88.011 27.559,88.773 31.048,88.773 31.341,89.066 C8.2@31.341,90.015 ; USB.5 29.898,94.66 31.451,94.66 v1(31.496,94.615) C8.2 ; C7.2 51.689,86.614 52.33,87.255 CH340C.1 ; C11.1 C10.1
  Top Layer w0.5: RST.2 RST.2@26.797,86.304 ; C8.2@31.341,90.015 C8.2 ; 35.052,69.469 35.052,71.208 ; 46.482,69.469 46.482,71.501 57.15,71.501 ; CH340C.1 v1(54.483,89.281) ; DISPLAY.2 57.15,71.501 ; 57.912,69.469 58.039,69.596 58.039,70.993 57.531,71.501 57.15,71.501 ; PWR.2@61.023,93.98 62.166,95.123 C5.1@63.309,95.123 ; v1(63.246,97.409) 63.309,97.346 C5.1@63.309,95.123 ; C6.1@63.373,93.036 C5.1 63.309,95.059 C5.1@63.309,95.123 ; ESP32.38 66.093,66.495 v1(66.167,66.421) 74.971,66.421 ; v1(69.342,104.648) 83.058,104.648 ; AMS1117.1 74.846,90.248 74.803,90.205 74.803,87.669 75.096,87.376 77.558,87.376 77.851,87.083 ESP32.15 77.851,77.216 76.454,75.819 74.982,75.819 ESP32.39_7 ; 74.971,66.634 74.971,68.961 ; ESP32.39_1 74.971,68.961 ; AMS1117.1@75.001,90.455 75.934,91.388 v1@77.037,91.388 ; 75.057,66.548 80.583,66.548 ESP32.1 ; v1(77.724,68.961) 74.971,68.961 ; C3.1 WIFI_STT.2 82.411,88.773 85.471,85.713 85.471,81.7 85.178,81.407 C9.1 ; C1.1 C4.1 81.026,91.388 v1@82.371,91.388 ; C1.1@81.082,96.52 C2.2 ; C11.1 v1(85.471,68.834)
  Top Layer w1: PWR.2 PWR.2@61.023,93.98 ; C6.1 C6.1@63.373,93.035 ; C3.1 C3.1@81.026,91.388 ; C1.1 81.026,96.464 C1.1@81.082,96.52 ; C2.2 85.598,99.695 83.058,102.235 83.058,104.648 83.058,120.722 83.644,121.308 85.564,121.308 85.661,121.405
  Bottom Layer w0.254: v1(66.167,66.421) v1@66.31,66.564 ; ESP32.39_14 ESP32.39_19 ; ESP32.39_11 ESP32.39_10 74.822,72.16 74.971,72.309 ESP32.39_12 74.971,73.995 ESP32.39_15 74.053,74.912 ESP32.39_17 74.971,75.64 74.781,75.83 ESP32.39_20 ESP32.39_21 71.45,75.83 71.301,75.681 ESP32.39_19 ; ESP32.39_13 72.219,73.077 ESP32.39_16 72.218,74.912 ; ESP32.39_18 72.219,74.912 ; ESP32.39_19 72.218,74.912
  Bottom Layer w0.5: v1(31.496,94.615) 31.496,101.18 31.789,101.473 63.342,101.473 ; v1(54.483,89.281) 55.46,89.281 55.753,89.574 55.753,97.116 56.046,97.409 v1(63.246,97.409) 63.342,97.505 63.342,101.473 ; 57.912,69.469 57.912,67.31 58.801,66.421 v1(66.167,66.421) ; v1(69.342,104.648) 63.635,104.648 63.342,104.355 63.342,101.473 ; v1(77.724,68.961) 77.787,68.897 85.407,68.897 v1(85.471,68.834)
  Bottom Layer w1: v1(77.089,91.44) v1(82.423,91.44)
IO0: ESP32.25 FLASH.1 Q2.2 R6.1 | length 61
  Top Layer w0.254: FLASH.1 34.798,79.756 35.568,78.986 35.822,78.986 R6.1 ; v1(36.068,89.154) 36.068,96.291 39.188,99.41 Q2.2 ; v1(36.195,76.835) R6.1 ; v1(58.801,83.058) 56.007,83.058 51.562,78.613 R6.1 ; v1(61.087,83.058) 63.583,83.058 ESP32.25
  Bottom Layer w0.254: v1(36.068,89.154) 36.131,89.09 36.131,76.898 v1(36.195,76.835) ; v1(58.801,83.058) v1(61.087,83.058)
IO12: ESP32.14 R9.1 | length 2.8
  Top Layer w0.5: ESP32.14 R9.1@83.442,83.005
"Net220VAC to 5VDC_1": "220VAC to 5VDC.1" FUSE.2 RV1.2 | length 17.6
  Bottom Layer w1.5: FUSE.2 42.792,120.784 46.415,117.161 55.305,117.161 56.261,116.205
"Net220VAC to 5VDC_2": 220VAC.2 "220VAC to 5VDC.2" RV1.1 | length 24.3
  Bottom Layer w1.5: 220VAC.2 RV1.1@49.101,109.855 ; RV1.1 49.278,109.661 49.345,109.728 52.868,109.728 54.345,111.205 56.261,111.205
Net220VAC_1: 220VAC.1 FUSE.1 | length 19.7
  Top Layer w1.5: 220VAC.1 32.639,117.729 39.634,117.729 40.513,116.85 FUSE.1
  Bottom Layer w1: FUSE.1@40.479,105.818 FUSE.1
NetC8_1: C8.1 R7.1 RST.1 | length 15
  Top Layer w0.254: v1(27.305,90.17) C8.1 ; v1(33.655,90.17) 33.726,90.099 RST.1 33.74,86.219 34.558,86.219 35.199,85.578 35.707,85.578 R7.1
  Bottom Layer w0.254: v1(27.305,90.17) v1(33.655,90.17)
NetD1_A: D1.A USB.1 | length 3.7
  Top Layer w0.254: USB.1 29.876,97.282 31.496,97.282 32.356,98.142 D1.A
NetLED1_1: PWR.1 R1.2 | length 2.9
  Top Layer w0.5: PWR.1@61.023,91.694 62.166,90.551 R1.2
  Top Layer w1: PWR.1 PWR.1@61.023,91.694
NetLED2_1: R9.2 WIFI_STT.1 | length 7.4
  Top Layer w0.5: WIFI_STT.1 78.74,87.503 81.026,85.217 R9.2@83.961,85.217
NetQ1_3: Q1.3 R4.1 | length 6.7
  Top Layer w0.254: Q1.3 40.005,87.909 40.005,90.424 41.593,92.011 43.244,92.011 R4.1
NetQ2_3: Q2.3 R5.1 | length 4.1
  Top Layer w0.254: R5.1 38.989,96.266 39.771,97.048 Q2.3
NetR9_1: CH340C.2 R2.1 | length 3.7
  Top Layer w0.5: CH340C.2 52.38,90.601 55.93,90.601 R2.1
NetR10_1: CH340C.3 R3.1 | length 7
  Top Layer w0.5: CH340C.3 v1(54.102,91.821) ; v1(54.102,95.123) R3.1
  Bottom Layer w0.5: v1(54.102,91.821) v1(54.102,95.123)
RXD0/USB_TX: ESP32.35 R2.2 | length 29.3
  Top Layer w0.254: v1(58.293,88.138) R2.2 ; ESP32.35 63.71,70.231 v1(65.405,70.231)
  Bottom Layer w0.254: v1(58.293,88.138) 65.256,88.138 65.405,87.989 v1(65.405,70.231)
RXD2/PZEM_TX: "PHASE 1.3" "PHASE 2.3" "PHASE 3.3" ESP32.27 | length 69.6
  Top Layer w0.254: v1(32.512,64.77) v1(44.069,64.77) 44.133,64.706 55.435,64.706 v1(55.499,64.643) ; ESP32.27 63.71,80.391 v1(67.818,80.391)
  Bottom Layer w0.254: v1(32.512,64.77) 32.512,69.469 ; 43.942,69.469 44.005,69.406 44.005,64.834 v1(44.069,64.77) ; 55.372,69.469 55.435,69.406 55.435,64.706 v1(55.499,64.643) 67.669,64.643 67.818,64.792 v1(67.818,80.391)
T_CLK: DISPLAY.7 DISPLAY.10 ESP32.30 | length 43.3
  Top Layer w0.254: v1(39.243,76.581) 39.306,76.517 45.783,76.517 v1(45.847,76.454) 45.855,76.462 50.538,76.462 v1(50.546,76.47) ; v1(53.086,76.597) v1(61.214,76.597) 63.578,76.597 ESP32.30
  Bottom Layer w0.254: v1(39.243,76.581) 39.243,76.379 39.001,76.137 39.001,76.085 38.556,75.64 37.286,75.64 36.917,75.271 36.917,73.62 DISPLAY.10 36.945,73.418 36.945,72.501 37.183,72.263 44.301,72.263 44.45,72.412 DISPLAY.7 ; v1(45.847,76.454) v1(45.847,80.518) ; v1(50.546,76.47) 50.665,76.589 53.078,76.589 v1(53.086,76.597)
T_CS: DISPLAY.11 ESP32.29 | length 35.3
  Top Layer w0.254: v1(37.592,76.581) 38.735,77.724 v1(47.498,77.724) v1(50.546,77.724) ; v1(53.086,77.851) v1(61.214,77.851) 63.562,77.851 ESP32.29
  Bottom Layer w0.254: DISPLAY.11 34.29,75.563 34.439,75.712 36.469,75.712 37.195,76.438 37.449,76.438 v1(37.592,76.581) ; v1(47.498,77.724) 47.561,77.787 47.561,80.581 v1(47.625,80.645) ; v1(50.546,77.724) 50.609,77.787 53.023,77.787 v1(53.086,77.851)
T_DIN: DISPLAY.6 DISPLAY.12 ESP32.37 | length 39.4
  Top Layer w0.254: v1(61.087,67.818) 63.583,67.818 ESP32.37
  Bottom Layer w0.254: DISPLAY.12 31.75,71.65 31.899,71.501 47.139,71.501 ; DISPLAY.6 46.99,71.65 47.139,71.501 ; v1(61.087,67.818) 61.087,71.12 60.706,71.501 47.139,71.501
T_DO: DISPLAY.9 DISPLAY.13 ESP32.31 | length 43
  Top Layer w0.254: DISPLAY.13 29.21,75.543 29.359,75.692 39.243,75.692 39.497,75.438 39.497,73.66 DISPLAY.9 39.37,72.285 39.519,72.136 55.731,72.136 55.88,72.285 55.88,75.162 56.029,75.311 v1(61.214,75.311) 61.288,75.385 ESP32.31
T_IRQ: DISPLAY.14 ESP32.7 | length 74.8
  Top Layer w0.254: DISPLAY.14 25.781,72.644 25.781,63.881 26.035,63.627 v1(76.454,63.627) ; v1(78.74,74.041) 80.562,74.041 ESP32.7
  Bottom Layer w0.5: v1(76.454,63.627) 76.454,73.025 77.47,74.041 v1(78.74,74.041)
TFT_CS: DISPLAY.3 ESP32.23 | length 25.6
  Top Layer w0.254: v1(62.738,86.372) 62.75,86.36 67.542,86.36 67.691,86.211 ESP32.23
  Bottom Layer w0.254: DISPLAY.3 54.61,80.899 57.785,84.074 61.468,84.074 62.738,85.344 v1(62.738,86.372)
TFT_DC: DISPLAY.5 ESP32.24 | length 26.8
  Top Layer w0.254: v1(61.214,85.344) 61.357,85.487 61.732,85.487 61.736,85.491 63.103,85.491 63.337,85.725 66.272,85.725 66.421,85.576 ESP32.24
  Bottom Layer w0.254: DISPLAY.5 49.403,73.66 49.403,78.74 56.007,85.344 v1(61.214,85.344)
TFT_RESET: DISPLAY.4 ESP32.26 | length 17.8
  Top Layer w0.254: DISPLAY.4 52.07,78.359 55.372,81.661 v1(61.087,81.661) 63.562,81.661 ESP32.26
TXD0/USB_RX: ESP32.34 R3.2 | length 33.6
  Top Layer w0.254: R3.2 59.414,95.123 59.563,94.974 v1(59.563,89.019) ; ESP32.34 63.689,71.628 v1(66.286,71.628)
  Bottom Layer w0.254: v1(59.563,89.019) 65.54,89.019 66.286,88.273 v1(66.286,71.628)
TXD2/PZEM_RX: "PHASE 1.2" "PHASE 2.2" "PHASE 3.2" ESP32.28 | length 72.7
  Top Layer w0.254: v1(29.972,66.04) 30.107,65.905 41.267,65.905 v1(41.275,65.913) v1(52.705,65.913) ; ESP32.28 63.71,79.121 v1(68.961,79.121)
  Bottom Layer w0.254: v1(29.972,66.04) 29.972,69.469 ; v1(41.275,65.913) 41.338,65.977 41.338,69.406 41.402,69.469 ; 52.832,69.469 52.832,66.04 v1(52.705,65.913) 52.705,63.776 52.854,63.627 68.812,63.627 68.961,63.776 v1(68.961,79.121)
USB_DTR: CH340C.13 Q2.1 R4.2 | length 7.4
  Top Layer w0.254: Q2.1 42.266,96.545 43.434,95.377 R4.2 44.45,94.488 45.847,93.091 CH340C.13
USB_RTS: CH340C.14 Q1.1 R5.2 | length 15.8
  Top Layer w0.254: R5.2 40.513,92.329 41.529,93.345 44.323,93.345 45.847,91.821 ; Q1.1 43.793,86.944 43.942,87.093 43.942,89.916 45.847,91.821 ; CH340C.14 45.847,91.821
pads on no net: AMS1117.4 CH340C.7 CH340C.8 CH340C.9 CH340C.10 CH340C.11 CH340C.12 CH340C.15 ESP32.4 ESP32.5 ESP32.6 ESP32.8 ESP32.9 ESP32.10 ESP32.11 ESP32.12 ESP32.13 ESP32.16 ESP32.17 ESP32.18 ESP32.19 ESP32.20 ESP32.21 ESP32.22 ESP32.32 ESP32.33 ESP32.36 USB.4 USB.S1 USB.S2 USB.S3 USB.S4 USB.S5 USB.S6

## Keep-outs
Keep-Out Layer:
  lines w0.254: 25.4,60.579 25.4,127 25.527,126.873 93.091,126.873 93.091,60.579 25.4,60.579

## Text inside footprints (layer, text, board x,y; h text height)
ESP32: Mechanical 13 "ANTENNA" at 78.136,62.755 h1.78 r180